# EAGLE board swigert (EAGLE 7.6.0)
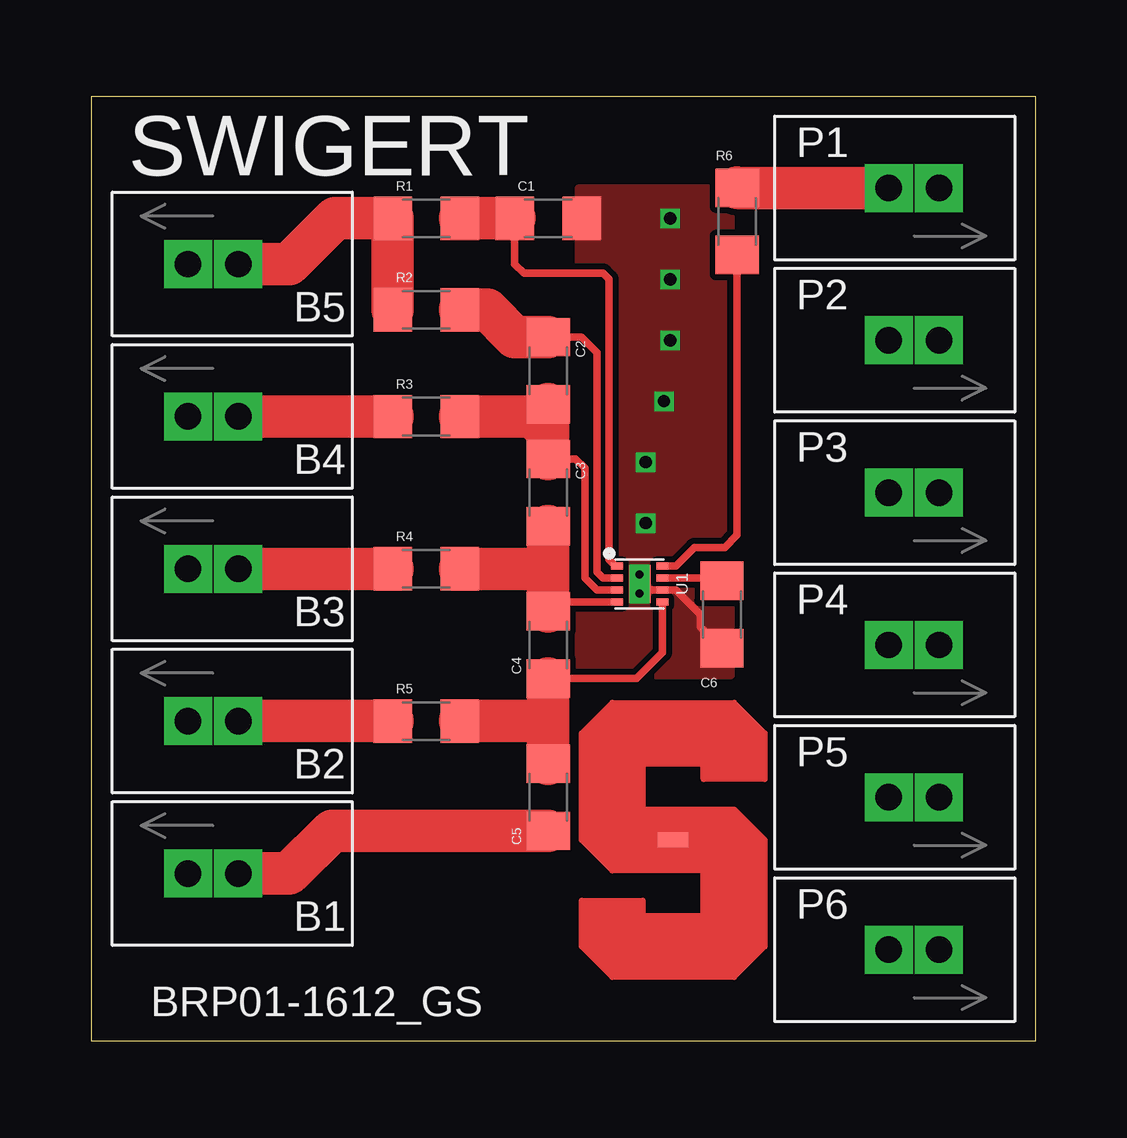
[diagram p0: board, top side]
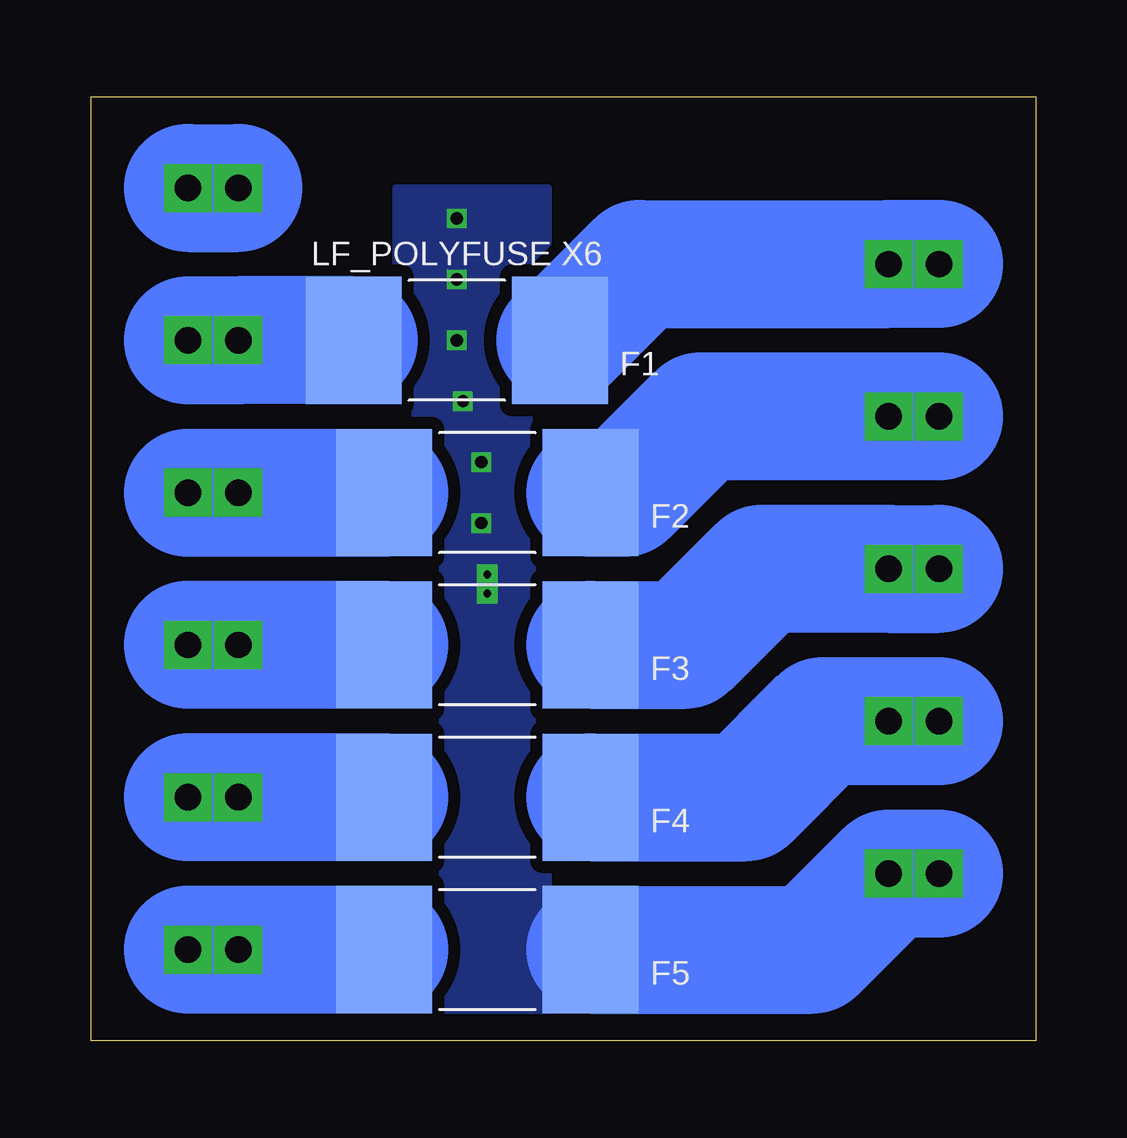
[diagram p1: board, bottom side, seen from below]

Size 39.37 x 39.37 mm. Coordinates in mm from the lower left corner, seen from the top.
Outline: 0,0 39.37,0 39.37,39.37 0,39.37 0,0
Copper layers (1*16): Top 0.035mm / dielectric 1.5mm / Bottom 0.035mm
Design rules "DirtyPCBs-2layer": minimum track width 5mil, minimum drill 12mil, track to track 5mil, track to pad 5mil, pad to pad 5mil, via to via 5mil, smd to smd 0mil, copper to edge 10mil, drill to drill 10mil, minimum pad ring 10mil, minimum via ring 6mil, stop-mask expansion 2mil, vias tented up to drill 25mil, thermal gap 10mil

## Footprints (pad centres in the part's own frame; a part is rotated, then mirrored left to right if it is on the bottom)
MOLEX_SRT_14-20 = drill 1.1 pad 2 square: P$1 0,1.05; P$2 0,-1.05
1206 = smd 1.6 x 1.8: 1 -1.4,0; 2 1.4,0
2920 = smd 4 x 5.3: P$1 -4.3,0; P$2 4.3,0
SU_LOGO_SS = smd 1.27 x 0.635: P$1 0,0
WSON8 = smd 0.28 x 0.5: P$1 -0.75,-0.95; P$2 -0.25,-0.95; P$3 0.25,-0.95; P$4 0.75,-0.95; P$5 0.75,0.95; P$6 0.25,0.95; P$7 -0.25,0.95; P$8 -0.75,0.95 | smd 1.6 x 0.9: P$9 0,0 | drill 0.33 pad 0.508 square: P$9_1 -0.4,0; P$9_2 0.4,0

## Placement (x,y rotation side)
B1  MOLEX_SRT  [MOLEX_SRT_14-20]  5.08,6.99 270 top
B2  MOLEX_SRT  [MOLEX_SRT_14-20]  5.08,13.34 270 top
B3  MOLEX_SRT  [MOLEX_SRT_14-20]  5.08,19.68 270 top
B4  MOLEX_SRT  [MOLEX_SRT_14-20]  5.08,26.04 270 top
B5  MOLEX_SRT  [MOLEX_SRT_14-20]  5.08,32.38 270 top
C1  0.1u  [1206]  19.05,34.29 0 top
C2  0.1u  [1206]  19.05,27.94 270 top
C3  0.1u  [1206]  19.05,22.86 270 top
C4  0.1u  [1206]  19.05,16.51 270 top
C5  0.1u  [1206]  19.05,10.16 270 top
C6  0.1u  [1206]  26.29,17.78 270 top
F1  LF_POLYFUSE X6  [2920]  24.13,29.21 180 bottom
F2  LF_POLYFUSE  [2920]  22.86,22.86 180 bottom
F3  LF_POLYFUSE  [2920]  22.86,16.51 180 bottom
F4  LF_POLYFUSE  [2920]  22.86,10.16 180 bottom
F5  LF_POLYFUSE  [2920]  22.86,3.81 180 bottom
LOGO  SU_LOGO-DUMMY2  [SU_LOGO_SS]  24.26,8.38 180 top
P1  MOLEX_SRT  [MOLEX_SRT_14-20]  34.29,35.56 90 top
P2  MOLEX_SRT  [MOLEX_SRT_14-20]  34.29,29.21 90 top
P3  MOLEX_SRT  [MOLEX_SRT_14-20]  34.29,22.86 90 top
P4  MOLEX_SRT  [MOLEX_SRT_14-20]  34.29,16.51 90 top
P5  MOLEX_SRT  [MOLEX_SRT_14-20]  34.29,10.16 90 top
P6  MOLEX_SRT  [MOLEX_SRT_14-20]  34.29,3.81 90 top
R1  100  [1206]  13.97,34.29 0 top
R2  1k  [1206]  13.97,30.48 0 top
R3  1k  [1206]  13.97,26.04 0 top
R4  1k  [1206]  13.97,19.68 0 top
R5  1k  [1206]  13.97,13.34 0 top
R6  5.1k  [1206]  26.92,34.16 90 top
U1  BQ294709  [WSON8]  22.86,19.05 270 top

## Library data of the parts
B1-B5 F1-F5 LOGO P1-P6 U1 = components
C1-C6 = SparkFun-Capacitors
R1-R6 = SparkFun-Resistors

## Nets
GND: B1.P$1 B1.P$2 C1.2 C5.2 C6.2 F5.P$1 U1.P$6 U1.P$9 U1.P$9_1 U1.P$9_2
N$1: C1.1 R1.2 U1.P$1
N$2: C2.1 R2.2 U1.P$2
N$3: C2.2 C3.1 R3.2 U1.P$3
N$4: C3.2 C4.1 R4.2 U1.P$4
N$5: C4.2 C5.1 R5.2 U1.P$5
N$6: F4.P$2 P5.P$1 P5.P$2
N$7: B2.P$1 B2.P$2 F4.P$1 R5.1
N$8: C6.1 U1.P$7
N$9: B3.P$1 B3.P$2 F3.P$1 R4.1
N$10: B4.P$1 B4.P$2 F2.P$1 R3.1
N$11: B5.P$1 B5.P$2 F1.P$1 R1.1 R2.1
N$12: R6.1 U1.P$8
N$13: P1.P$1 P1.P$2 R6.2
N$14: F3.P$2 P4.P$1 P4.P$2
N$15: F2.P$2 P3.P$1 P3.P$2
N$16: F1.P$2 P2.P$1 P2.P$2
N$17: F5.P$2 P6.P$1 P6.P$2

## Tracks (layer width: path | path; a pad name or v marks a point on that pad's centre or on a via)
GND  (via drill 0.51)
  Top 0.305: U1.P$9 23.11,18.8 U1.P$6 24.38,18.8 25.4,17.78 25.4,17.27 C6.2
  Top 1.778: C5.2 10.03,8.76 8.26,6.99 B1.P$1
  Bottom 5.334: F5.P$1 9.3,3.81 B1.P$1 B1.P$2
  other vias: 23.11,21.59 23.11,24.13 23.88,26.67 24.13,29.21 24.13,31.75 24.13,34.29
  pour Top (isolate 0.254, no thermals): 20.32,35.56 26.67,35.56 26.67,15.24 20.32,15.24
  pour Bottom (isolate 0.508, no thermals): 20.32,35.56 26.67,35.56 26.67,1.27 20.32,1.27
N$1
  Top 0.305: C1.1 17.65,32.39 18.03,32 21.34,32 21.59,31.75 21.59,20.07 21.86,19.8 U1.P$1
  Top 1.778: R1.2 C1.1
N$2
  Top 0.305: U1.P$2 21.34,19.3 21.08,19.56 21.08,28.7 20.44,29.34 C2.1
  Top 1.778: R2.2 16.51,30.48 17.65,29.34 C2.1
N$3
  Top 0.305: U1.P$3 21.08,18.8 20.57,19.3 20.57,23.88 20.19,24.26 C3.1
  Top 1.778: R3.2 18.41,26.04 19.05,25.4 | 19.05,25.4 C2.2 | C3.1 19.05,25.4
N$4
  Top 0.305: U1.P$4 19.44,18.3 C4.1
  Top 1.778: R4.2 19.05,19.68 | 19.05,19.68 C3.2 | 19.05,19.68 C4.1
N$5
  Top 0.305: U1.P$5 23.81,16.19 22.73,15.11 C4.2
  Top 1.778: R5.2 19.05,13.34 | 19.05,13.34 C4.2 | C5.1 19.05,13.34
N$6
  Bottom 5.334: P5.P$2 P5.P$1 F4.P$2
N$7
  Top 1.778: R5.1 B2.P$1
  Bottom 5.334: F4.P$1 12.06,10.16 8.89,13.34 B2.P$1 B2.P$2
N$8
  Top 0.305: U1.P$7 26.17,19.3 C6.1
N$9
  Top 1.778: R4.1 B3.P$1
  Bottom 5.334: F3.P$1 14.61,16.51 11.43,19.68 B3.P$1 B3.P$2
N$10
  Top 1.778: R3.1 B4.P$1
  Bottom 5.334: F2.P$1 17.14,22.86 13.97,26.04 B4.P$1 B4.P$2
N$11
  Top 1.778: R2.1 R1.1 10.16,34.29 8.26,32.38 B5.P$1
  Bottom 5.334: B5.P$2 B5.P$1 16.51,32.38 19.68,29.21 F1.P$1
N$12
  Top 0.305: 24.25,19.8 U1.P$8 24.37,19.8 25.15,20.57 26.42,20.57 26.92,21.08 R6.1
N$13
  Top 1.778: P1.P$1 27.05,35.56 R6.2
  Bottom 5.334: P1.P$2 P1.P$1
N$14
  Bottom 5.334: F3.P$2 P4.P$1 P4.P$2
N$15
  Bottom 5.334: P3.P$2 P3.P$1 F2.P$2
N$16
  Bottom 5.334: F1.P$2 P2.P$1 P2.P$2
N$17
  Bottom 5.334: P6.P$2 P6.P$1 F5.P$2

## Text on the board
tPlace: SWIGERT | BRP01-1612_GS